# Altium PCB Colour-Sensor.PcbDoc
Units mm, origin at the board's own origin, x right, y up, seen from the top; angles counter-clockwise.
Board outline 31.5 x 40.5 mm, 2 copper layers (Top Layer, Bottom Layer), stack 1.611 mm thick; 40 components, 30 nets, 135 pads, 31 vias.
Unrouted connection lines stored in the file: 1.
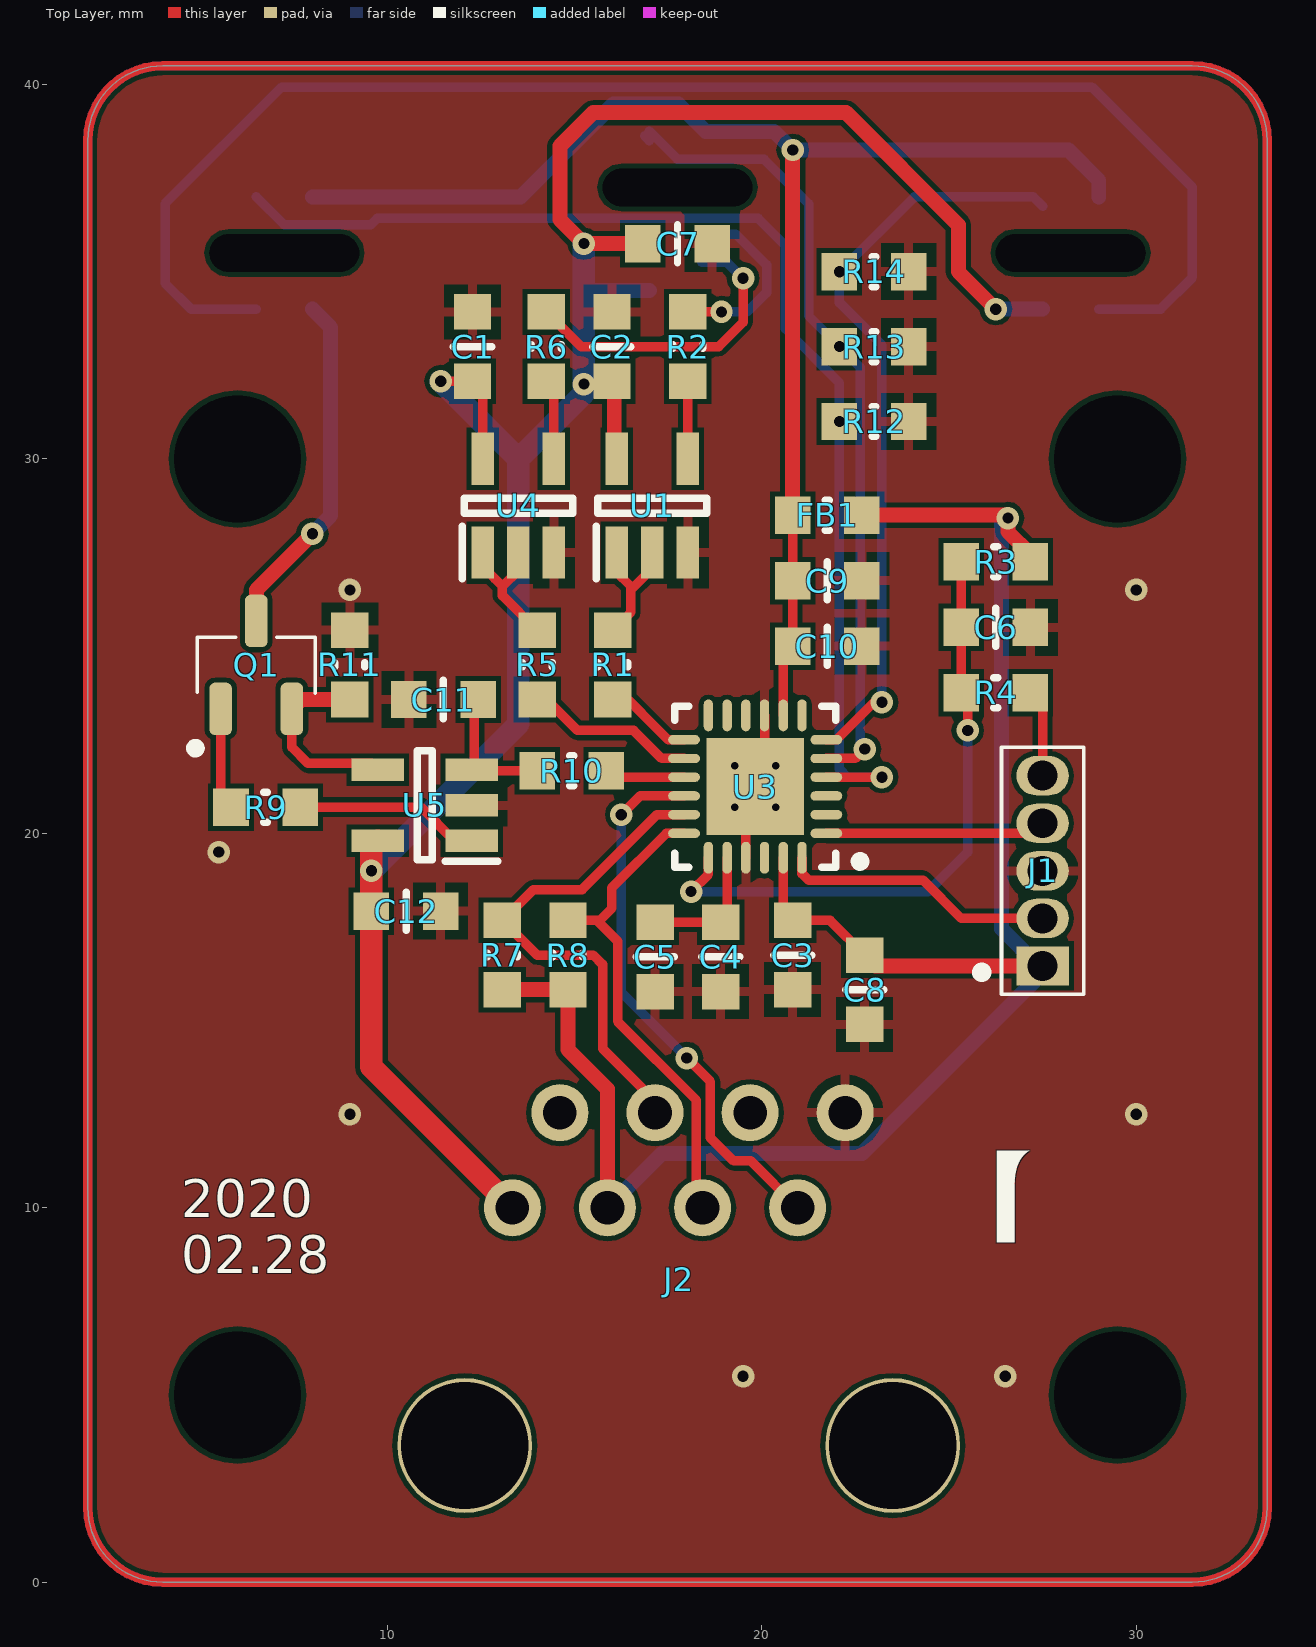
[diagram p0: Top Layer view]
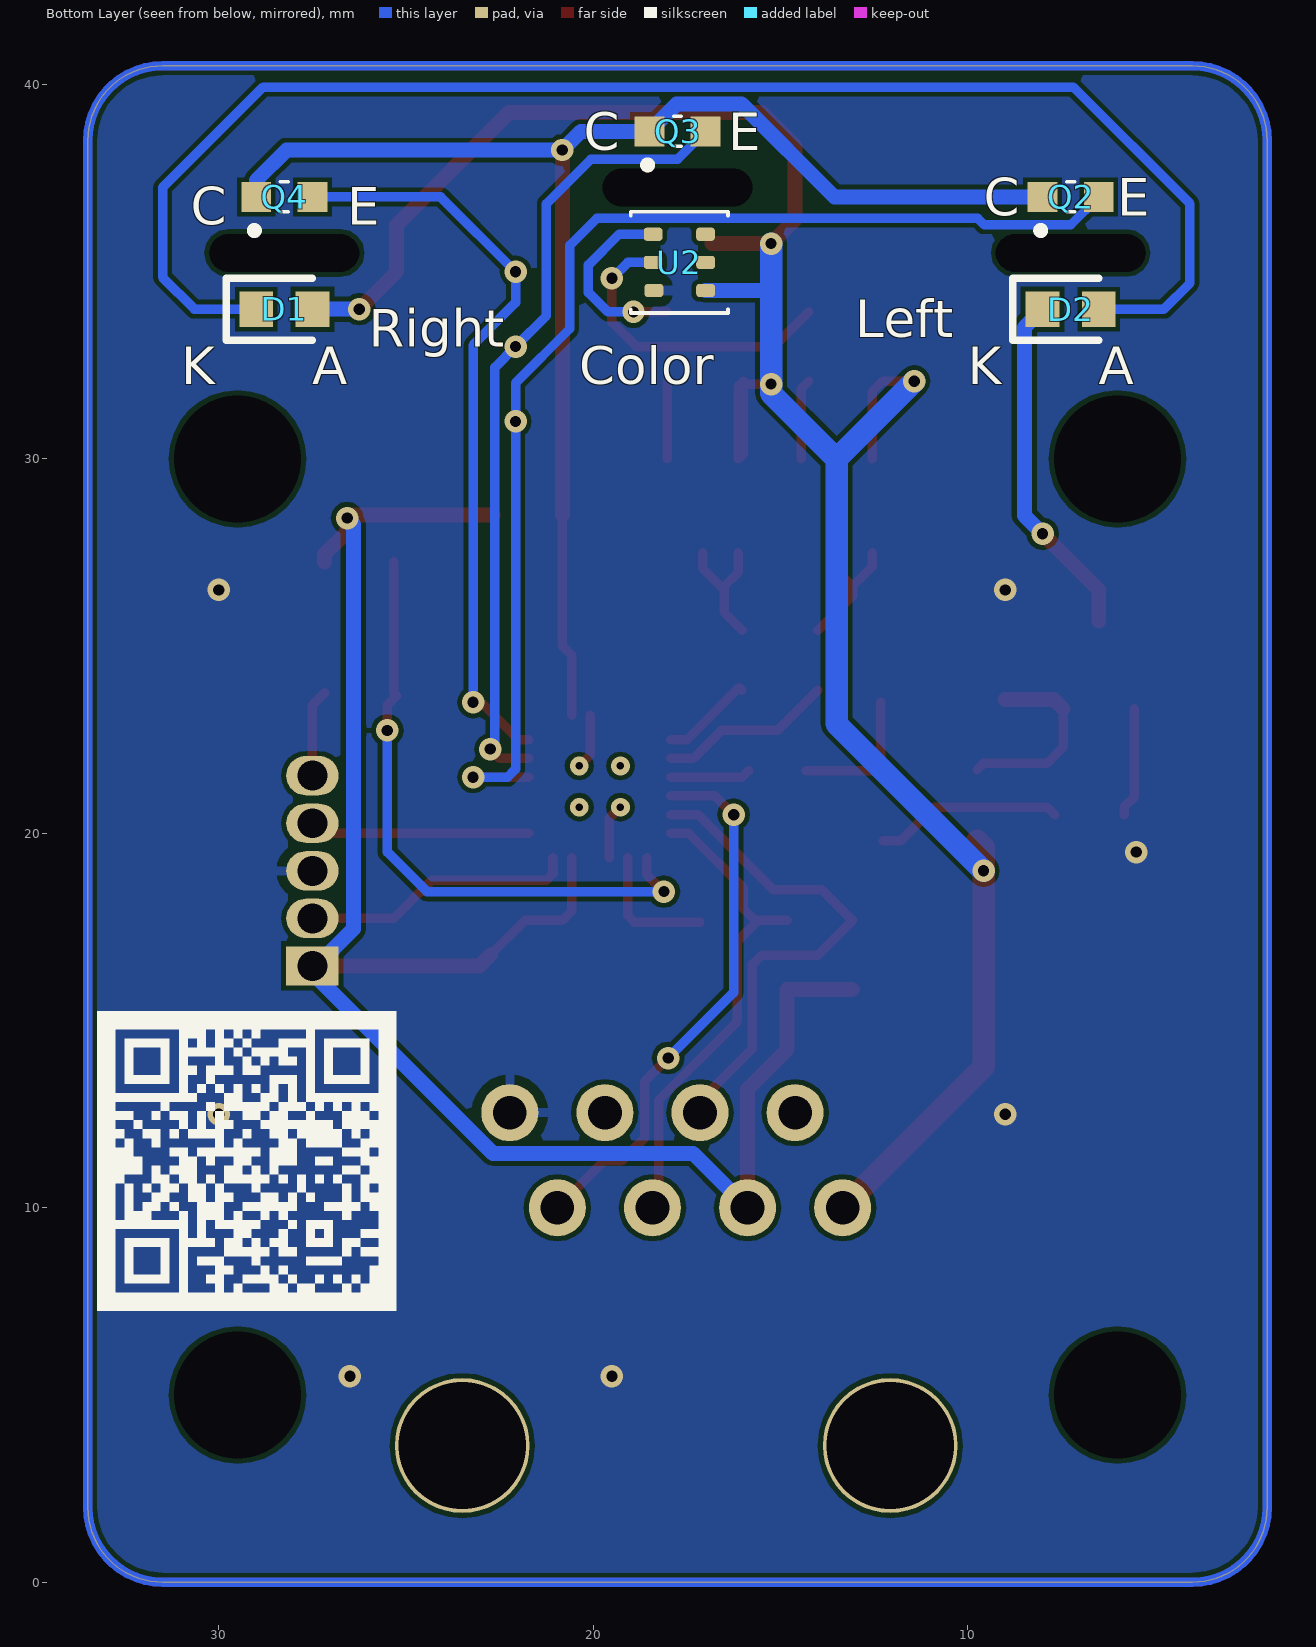
[diagram p1: Bottom Layer view, seen from below]
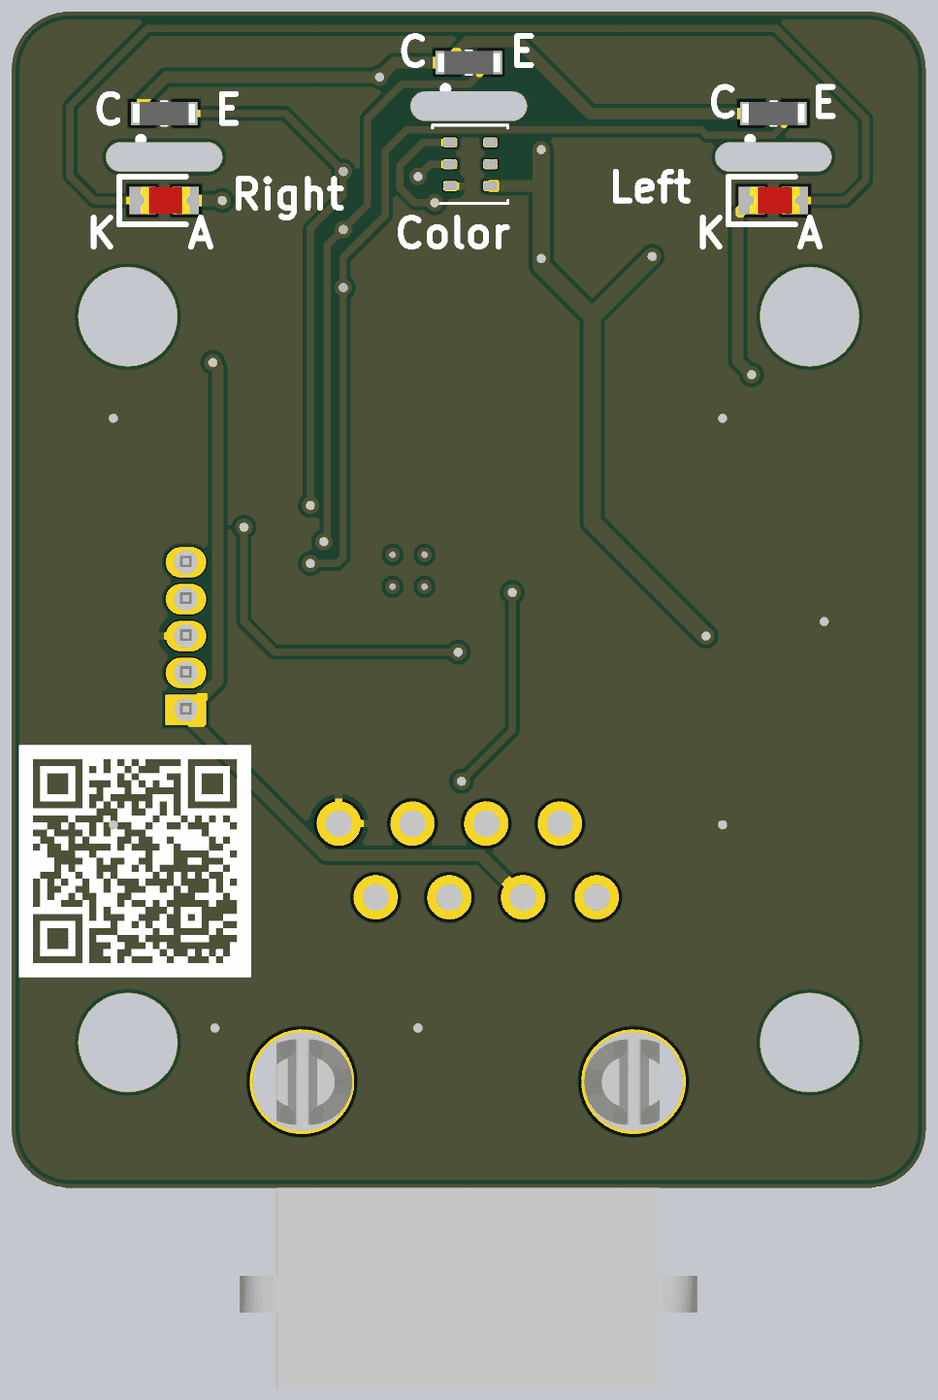
[diagram p2: 3D render of the assembled board from below, using the file's embedded part models]

## Layer stack, top to bottom
Top Solder: solder mask 0.0102, Solder Resist, Dk 3.5
Top Layer: signal copper 0.0356
Dielectric 1: dielectric 1.54, FR-4, Dk 4.8
Bottom Layer: signal copper 0.0356
Bottom Solder: solder mask 0.0102, Solder Resist, Dk 3.5

## Board outline
2,2 ccw(c4,2) 4,0 31.5,0 ccw(c31.5,2) 33.5,2 33.5,38.5 ccw(c31.5,38.5) 31.5,40.5 4,40.5 ccw(c4,38.5) 2,38.5

## Design rules (kind name [scope] priority, off if disabled: settings)
Clearance [All] p1: gap=0.127 ignorepadtopadclearanceinfootprint=FALSE
PolygonConnect PolygonConnect_1 [All vs IsVia] p1: connectstyle=Direct reliefconductorwidth=0.254 reliefentries=4 polygonreliefangle="90 Angle" airgapwidth=0.254
PolygonConnect [All] p2: connectstyle=Relief reliefconductorwidth=0.254 reliefentries=4 polygonreliefangle="90 Angle" airgapwidth=0.254
RoutingVias [All] p1: holewidth=0.3 width=0.6 viastyle="Through Hole" minholewidth=0.3 minwidth=0.6 maxholewidth=2 maxwidth=2.5
SolderMaskExpansion [All] p1: expansion=0.102
Width [All] p1: maxlimit=12.7 minlimit=0.127 preferedwidth=0.254
30 further rules are at their usual default settings.

## Components (designator, comment, footprint, x,y, rotation, side; value= is the part's Value field where it differs from the comment)
C1 "100nF" CAP1608X06M 12.275,33 r270 top
C2 "100nF" CAP1608X06M 16,33 r270 top
C3 "100nF" CAP1608X06M 20.825,16.75 r90 top
C4 "100nF" CAP1608X06M 18.9,16.7 r90 top
C5 "1uF" CAP1608X06M 17.15,16.7 r90 top
C6 "100nF" CAP1608X06M 26.25,25.5 r180 top
C7 "100nF" CAP1608X06M 17.75,35.75 r180 top
C8 "10uF" CAP1608X06M 22.75,15.825 r90 top
C9 "10uF" CAP1608X06M 21.75,26.75 r180 top
C10 "100nF" CAP1608X06M 21.75,25 r180 top
C11 "100nF" CAP1608X06M 11.5,23.575 r0 top
C12 "100nF" CAP1608X06M 10.5,17.925 r180 top
D1 "LTST-C190CKT" LEDC1608X90N 28.25,34 r180 bottom
D2 "LTST-C190CKT" LEDC1608X90N 7.25,34 r180 bottom
FB1 "200@100MHz" RESC1608X06M 21.75,28.5 r180 top
J1 "SWD" Sullins_GRPB051VWVN-RC 27.5,19 r90 top
J2 "RJ45-8P8C-S" RJ45-8P8C 13.339,10 r0 top locked
Q1 "NX7002AK,215" SOT-23-3 6.5,24.5 r90 top
Q2 "KDT00030TR" KDT00030TR 7.25,37 r180 bottom
Q3 "KDT00030TR" KDT00030TR 17.75,38.75 r180 bottom
Q4 "KDT00030TR" KDT00030TR 28.25,37 r180 bottom
R1 "100" RESC1608X06M 16.025,24.5 r90 top
R2 "100" RESC1608X06M 18.025,33 r90 top
R3 "10K" RESC1608X06M 26.25,27.25 r0 top
R4 "100" RESC1608X06M 26.25,23.75 r180 top
R5 "100" RESC1608X06M 14,24.5 r90 top
R6 "100" RESC1608X06M 14.25,33 r90 top
R7 "10K" RESC1608X06M 13.075,16.75 r270 top
R8 "10K" RESC1608X06M 14.825,16.75 r270 top
R9 "10" RESC1608X06M 6.75,20.7 r180 top
R10 "10K" RESC1608X06M 14.925,21.675 r0 top
R11 "100" RESC1608X06M 9,24.5 r270 top
R12 "10K" RESC1608X06M 23,31 r0 top
R13 "10K" RESC1608X06M 23,33 r0 top
R14 "10K" RESC1608X06M 23,35 r0 top
U1 "OR gate" SOT95P270X145-5N 17.075,28.75 r90 top
U2 "APA102-2020" APA102 18.4,36 r180 bottom
U3 "ATSAML10D16" QFN50P400X400X90_HS-25N 19.825,21.25 r180 top
U4 "OR gate" SOT95P270X145-5N 13.5,28.75 r90 top
U5 "OpAmp" SOT95P270X145-5N 11,20.75 r180 top

## Footprints (in the part's own frame and the unit in brackets; to place one, negate y for a bottom-side part, rotate by r counter-clockwise, add the part's x,y. Pads: shape width x height; smd on the part's side, far side on the other; paste and mask are expansions set on the pad)
APA102 [mm]
  rrect45% 0.5x0.35 smd paste-0.025 mask+0.05: 1(0,0) 2(0,-0.75) 3(0.021,-1.5) 4(1.4,-1.5) 5(1.4,-0.75) 6(1.4,0)
  silkscreen extent -0.6,-2.1 2,0.6, body extent -0.3,-1.78 1.7,0.3, height 0.9
CAP1608X06M [mm] "Chip Capacitor 2-Leads, Body 1,60x0,80mm, IPC Low Density"
  rect 0.95x1 smd: 1(-0.925,0) 2(0.925,0)
  silkscreen extent 0,-0.51 0,0.51, body extent -0.85,-0.45 0.85,0.45, height 0.6
KDT00030TR [mm]
  rect 0.8x0.8 smd: 1(-0.75,0) 2(0.75,0)
  silkscreen extent -0.9,-1 0.1,0.4, body extent -1.07,-0.4 1.07,0.4, height 0.7
LEDC1608X90N [mm]
  rect 0.9x0.95 smd: 1(-0.75,0) 2(0.75,0)
  silkscreen extent -1.55,-0.82 0.75,0.82, body extent -0.8,-0.45 0.9,0.45, height 0.9
QFN50P400X400X90_HS-25N [mm] "QFN, 24-Leads, Body 4,00x4,00mm, Pitch 0,50mm, Thermal Pad 2,60x2,60mm, IPC Medium Density"
  oval 0.85x0.25 smd paste+0.05 mask+0.05: 1(-1.9,1.25) 2(-1.9,0.75) 3(-1.9,0.25) 4(-1.9,-0.25) 5(-1.9,-0.75) 6(-1.9,-1.25) 13(1.9,-1.25) 14(1.9,-0.75) 15(1.9,-0.25) 16(1.9,0.25) 17(1.9,0.75) 18(1.9,1.25)
  oval 0.25x0.85 smd paste+0.05 mask+0.05: 7(-1.25,-1.9) 8(-0.75,-1.9) 9(-0.25,-1.9) 10(0.25,-1.9) 11(0.75,-1.9) 12(1.25,-1.9) 19(1.25,1.9) 20(0.75,1.9) 21(0.25,1.9) 22(-0.25,1.9) 23(-0.75,1.9) 24(-1.25,1.9)
  rect 2.6x2.6 smd paste+0.05 mask+0.05: 25(0,0)
  silkscreen extent -2.93,-2.15 2.15,2.15, body extent -2,-2 2,2, height 0.9
RESC1608X06M [mm] "Chip Resistor, 2-Leads, Body 1,60x0,80mm, IPC Low Density"
  rect 0.95x1 smd: 1(-0.925,0) 2(0.925,0)
  silkscreen extent -0.05,-0.4 0.05,0.4, body extent -0.85,-0.45 0.85,0.45, height 0.6
RJ45-8P8C [mil]
  round 141.73 hole 133.86: 0(-50,-250) 0(400,-250)
  round 60 hole 35.43: 1(0,0) 2(50,100) 3(100,0) 4(150,100) 5(200,0) 6(250,100) 7(300,0) 8(350,100)
  body extent -136,-665 484,145, height 638
SOT95P270X145-5N [mm]
  rect 1.4x0.6 smd: 1(-1.25,0.95) 2(-1.25,0) 3(-1.25,-0.95) 4(1.25,-0.95) 5(1.25,0.95)
  silkscreen extent -1.95,-1.45 0.2,1.5, body extent -1.35,-1.45 1.35,1.45, height 1.45
SOT-23-3 [mm]
  rrect50% 1.4x0.6 smd paste-0.025 mask+0.05: 1(-1.175,0.95) 2(-1.175,-0.95) 3(1.175,0)
  silkscreen extent -2.35,-1.58 0.74,1.75, body extent -1.5,-1.53 1.5,1.53, height 1.4
Sullins_GRPB051VWVN-RC [mm]
  rect 1.05x1.4 hole 0.8 paste-2 mask+0.05: 1(-2.54,0)
  rrect100% 1.05x1.4 hole 0.8 paste-2 mask+0.05: 2(-1.27,0) 3(0,0) 4(1.27,0) 5(2.54,0)
  silkscreen extent -3.3,-1.1 3.3,1.63, body extent -3.17,-1.07 3.18,1.07, height 4

## Part data
C1 C2 C3 C4 C6 C7 C10 C11 C12: library part "Capacitor 100n"
C5: library part "Capacitor 1u"
C8 C9: library part "Capacitor 10u"
D1 D2: "LED", Manufacturer_Name=Lite-On, Mouser2 Part Number=859-LTST-C190CKT, Datasheet Link=https://componentsearchengine.com/Datasheets/1/LTST-C190CKT.pdf, Height=0.9mm, Manufacturer_Part_Number=LTST-C190CKT, Mouser2 Price/Stock=https://www.mouser.com/Search/Refine.aspx?Keyword=859-LTST-C190CKT
FB1: library part "Generic ferrite bead"
Q1: Manufacturer=Nexperia, Author=ChAl, ComponentHeight=1.1mm, Device=NX7002AK,215, Manufacturer Part Number=NX7002AK,215, Mounted=Yes, Part Description="MOSFET, N-CH, 60V, 190mA, -55/+150, TO-236AB", Part Number=NX7002AK,215, SMD=Yes
Q2 Q3 Q4: "Phototransistor", Manufacturer_Name="ON Semiconductor", Datasheet Link=https://www.onsemi.com/pub/Collateral/KDT00030-D.PDF, Height=0.6mm, Manufacturer_Part_Number=KDT00030TR
R1 R2 R4 R5 R6 R11: library part "Resistor 100"
R3 R7 R8 R10 R12 R13 R14: library part "Resistor 10K"
R9: library part "Resistor 10"
U1 U4: library part SN74LV1T32, Manufacturer_Name="Texas Instruments", Manufacturer_Part_Number=SN74LV1T32DCKR, Datasheet Link=http://www.ti.com/lit/ds/symlink/sn74lv1t32.pdf, Mouser2 Price/Stock=https://hu.mouser.com/Search/Refine?Keyword=SN74LV1T32DCKR, Mouser code=595-SN74LV1T32DCKR
U2: "RGB LED"
U3: "48MHz 32bit ARM MCU", Flash size=16kB, RAM size=4kB
U5: library part MCP6001T-I_OT, "Integrated Circuit", Manufacturer_Name=Microchip, Manufacturer_Part_Number=MCP6001T-I/OT, Mouser2 Part Number=579-MCP6001T-I/OT, Datasheet Link=https://componentsearchengine.com/Datasheets/1/MCP6001T-I_OT.pdf, Height=1.45mm, Mouser2 Price/Stock=https://www.mouser.com/Search/Refine.aspx?Keyword=579-MCP6001T-I%2FOT
J2: Datasheet=/Robotics%20Platform/Datasheets/Connectors/5721-8P8C-????.pdf

## Free pads (board coordinates)
  round 1.524 hole 3.4: 2(6,5) 3(29.5,5) 4(29.5,30) 5(6,30)
  round 0 hole 1 slot 4 at 0 deg: 5(7.25,35.5) 5(17.75,37.25) 5(28.25,35.5)

## Via types
v1: diameter 0.6, hole 0.3, Top Layer to Bottom Layer, tented both sides, 27 vias
v2: diameter 0.5, hole 0.2, Top Layer to Bottom Layer, tented both sides, 4 vias

## Nets (pads, with @x,y where several pads share a name; then routed paths per layer and width w, separated by ;. In a path a pad name is that pad's centre, name@x,y a point inside that pad or via, vN(x,y) a via of type N, cw(c..) or ccw(c..) an arc to the next point about the centre after c; other vN are vias at no path point)
3V3: C3.2 C8.2 FB1.1 J1.1 J2.3 R3.2 R7.2 R8.2 U3.23 | length 49.3
  Top Layer w0.254: U3.23 20.575,17.925 C3.2 21.825,17.675 C8.2
  Top Layer w0.4: R7.2 R8.2 14.825,14.222 15.879,13.168 J2.3 ; FB1.1 26.494,28.5 v1(26.573,28.421) 26.573,28.058 27.175,27.456 R3.2 ; C8.2 23.04,16.46 J1.1
  Bottom Layer w0.4: J2.3 17.33,11.451 22.68,11.451 27.5,16.271 J1.1 27.39,16.46 26.406,17.444 26.406,28.254 v1(26.573,28.421)
3V3ANA: C9.2 C10.2 FB1.2 Q2.1 Q3.1 Q4.1 U3.8 | length 38.5
  Top Layer w0.254: U3.8 20.575,24.75 C10.2 C9.2 FB1.2
  Top Layer w0.4: FB1.2 v1(20.825,38.25)
  Bottom Layer w0.4: Q2.1 13.561,37 16.038,39.477 17.773,39.477 Q3.1 20.325,38.75 v1(20.825,38.25) 28.189,38.25 29,37.439 Q4.1
5V: C1.2 C2.2 C7.2 C12.2 D1.2 J2.1 U1.5 U2.4 U4.5 U5.5 | length 63.8
  Top Layer w0.254: v1(11.425,32.075) C1.2 12.55,31.8 U4.5 ; v1(15.25,32) C2.2@16,32 ; C2.2 C2.2@16,32 ; C2.2@16,32 16.075,32 16.125,31.95 U1.5 16,30.125 C2.2@16,32
  Top Layer w0.4: C7.2 v1(15.25,35.75) 14.609,36.391 14.609,38.359 15.5,39.25 22.25,39.25 25.25,36.25 25.25,35 v1(26.25,34)
  Top Layer w0.6: U5.5 9.575,19.625 v1(9.575,19) C12.2 9.575,13.764 J2.1
  Bottom Layer w0.4: 15.25,34.509 15.259,34.5 U2.4 ; v1(26.25,34) D1.2
  Bottom Layer w0.6: v1(9.575,19) 13.5,22.925 13.5,30 ; v1(11.425,32.075) 13.5,30 ; v1@15.25,35.75 15.25,34.509 v1(15.25,32) 15.25,31.75 13.5,30
AIN0: Q2.2 R12.1 U3.4 | length 32.1
  Top Layer w0.254: U3.4 v1(23.21,21.5)
  Bottom Layer w0.254: Q2.2 7.246,36.254 9.562,36.254 9.737,36.429 19.9,36.429 20.628,35.701 20.628,33.478 22.075,32.031 v1(22.075,31) 22.075,21.715 22.29,21.5 v1(23.21,21.5)
AIN1: Q3.2 R13.1 U3.5 | length 21.5
  Top Layer w0.254: U3.5 22.5,22 v1(22.75,22.25)
  Bottom Layer w0.254: Q3.2@16.875,38.625 Q3.2@17,38.5 ; Q3.2 17.746,38.004 20.062,38.004 21.25,36.816 21.25,33.825 v1(22.075,33) 22.629,32.446 22.629,22.371 v1(22.75,22.25)
AIN2: Q4.2 R14.1 U3.6 | length 20.2
  Top Layer w0.254: U3.6 22,22.5 23,23.5 v1(23.21,23.5)
  Bottom Layer w0.254: v1(23.21,23.5) 23.21,33.04 22.075,34.175 v1(22.075,35) 24.075,37 27.25,37 Q4.2@27.5,36.75
DIM: R10.2 U3.15 | length 2.1
  Top Layer w0.254: R10.2 16.025,21.5 U3.15
GND: C1.1 C2.1 C3.1 C4.1 C5.1 C6.1 C7.1 C8.1 C9.1 C10.1 C11.1 C12.1 J1.3 J2.8 R11.1 R12.2 R13.2 R14.2 U1.3 U2.3 U3.9 U3.21 U4.3 U5.2 | length 2.9
  Top Layer w0.254: 19.275,20.7 19.575,20.4 U3.21 ; U3.9 20.075,22.1 20.375,21.8
  other v1: 19.5,5.5 26.5,5.5 9,12.5 30,12.5 5.5,19.5 9,26.5 30,26.5
LED_CKI: R5.1 U3.14 | length 4.7
  Top Layer w0.254: R5.1@14,23.825 15.075,22.75 16.575,22.75 17.325,22 U3.14
LED_SDI: R1.1 U3.13 | length 2.5
  Top Layer w0.254: R1.1@16.03,23.82 16.105,23.895 17.5,22.5 U3.13
MCU_INT: J2.7 U3.16 | length 14.6
  Top Layer w0.254: v1(16.25,20.5) 16.75,21 U3.16 ; v1(18,14) 18.631,13.369 18.631,11.869 19.25,11.25 19.709,11.25 J2.7
  Bottom Layer w0.254: v1(16.25,20.5) 16.25,15.75 v1(18,14)
MCU_SCL: J2.5 R8.1 U3.18 | length 13.2
  Top Layer w0.254: R8.1 15.6,17.675 ; U3.18 17.45,20 16,18.55 16,18 15.675,17.675 15.6,17.675 ; J2.5 18.25,10.169 18.25,12.876 16.15,14.976 16.15,17.125 15.6,17.675
MCU_SDA: J2.4 R7.1 U3.17 | length 13.7
  Top Layer w0.254: J2.4 17.149,12.851 15.75,14.25 15.75,16.5 15.5,16.75 14,16.75 R7.1 13.9,18.5 15.2,18.5 17.2,20.5 U3.17
NetC4_2: C4.2 C5.2 U3.20 | length 3.5
  Top Layer w0.254: C5.2 C4.2 19.075,17.8 U3.20
NetC11_2: C11.2 R10.1 U5.3 | length 3.9
  Top Layer w0.254: C11.2@12.325,23.5 12.325,21.775 U5.3 12.275,21.675 R10.1 R10.1@14.325,21.675
NetD1_1: D1.1 D2.2 | length 39.9
  Bottom Layer w0.254: D2.2 4.759,34 4.067,34.692 4.067,36.817 7.181,39.931 28.819,39.931 31.5,37.25 31.5,34.848 30.652,34 D1.1
NetD2_1: D2.1 Q1.3 | length 9.3
  Top Layer w0.4: Q1.3 6.5,26.5 v1(8,28)
  Bottom Layer w0.4: v1(8,28) 8.486,28.486 8.486,33.514 D2.1
NetQ1_1: Q1.1 R9.2 | length 2.9
  Top Layer w0.254: Q1.1 5.55,20.975 R9.2 R9.2@5.825,20.5
NetQ1_2: Q1.2 R11.2 U5.4 | length 5.2
  Top Layer w0.254: Q1.2 7.45,22.3 7.881,21.869 9.581,21.869 U5.4
  Top Layer w0.4: Q1.2 7.7,23.575 R11.2
NetR1_2: R1.2 U1.1 U1.2 | length 3.7
  Top Layer w0.254: R1.2 16.5,25.9 16.5,26.5 ; U1.1 16.125,26.975 16.5,26.6 16.5,26.5 ; U1.2 17.075,27.075 16.5,26.5
NetR2_1: R2.1 U1.4 | length 2.1
  Top Layer w0.254: U1.4 R2.1
NetR2_2: R2.2 U2.1 | length 5.1
  Top Layer w0.254: R2.2 v1(18.925,33.925)
  Bottom Layer w0.254: U2.1 19.311,36 20.129,35.182 20.129,34.444 19.61,33.925 v1(18.925,33.925)
NetR5_2: R5.2 U4.1 U4.2 | length 3.8
  Top Layer w0.254: U4.1 12.55,27.125 12.875,26.8 13.075,26.6 ; U4.2 13.5,27.025 13.075,26.6 ; R5.2 13.075,26.35 13.075,26.6
NetR6_1: R6.1 U4.4 | length 2.2
  Top Layer w0.254: R6.1 14.45,31.875 U4.4
NetR6_2: R6.2 U2.2 | length 8.4
  Top Layer w0.254: R6.2 15.175,33 18.85,33 19.5,33.65 v1(19.5,34.825)
  Bottom Layer w0.254: U2.2 19.075,35.25 v1(19.5,34.825)
NetR9_1: R9.1 U5.1 | length 5
  Top Layer w0.254: R9.1@7.675,20.5 7.875,20.7 10.895,20.7 11.795,19.8 U5.1
nRST: C6.2 R3.1 R4.2 U3.19 | length 16.8
  Top Layer w0.254: v1(18.113,18.444) 18.575,18.906 U3.19 ; R3.1 C6.2 R4.2 25.25,23.675 25.5,23.425 v1(25.5,22.75)
  Bottom Layer w0.254: v1(18.113,18.444) 24.444,18.444 25.5,19.5 v1(25.5,22.75)
nRSTE: J1.5 R4.1 | length 2.3
  Top Layer w0.254: R4.1 27.5,23.425 J1.5
SWCLK: J1.2 U3.24 | length 7.3
  Top Layer w0.254: U3.24 21.075,18.925 21.25,18.75 24.309,18.75 25.329,17.73 J1.2
SWDIO: J1.4 U3.1 | length 5.9
  Top Layer w0.254: U3.1 27.23,20 J1.4
pads on no net: J2.0 J2.2 J2.6 U2.5 U2.6 U3.2 U3.3 U3.7 U3.10 U3.11 U3.12 U3.22 U3.25
copper on no net:
  other v2: 19.275,20.7 20.375,20.7 19.275,21.8 20.375,21.8

## Polygon pours and split planes (outlines as drawn)
GND on Top Layer "Top Layer-GND" (solid, remove dead copper, pour order 2): 2,0 33.5,0 33.5,40.5 2,40.5
GND on Bottom Layer "Bottom Layer-GND" (solid, remove dead copper, pour order 0): 2,0 33.5,0 33.5,40.5 2,40.25

## Other copper
Multi-Layer:
  the board outline again, w0.254

## Silkscreen, mask and mechanical layers (free items; w line width, h text height)
Top Overlay:
  text "2020 / 02.28" at 4.5,8.25 h1
  text "r" at 25.8,7.75 h7
Bottom Overlay:
  drawing of 252 lines, arcs and shapes, not listed
  text "E" at 16.4,38.25 h1
  text "C" at 20.25,38.25 h1
  text "E" at 6,36.5 h1
  text "C" at 9.575,36.5 h1
  text "E" at 26.573,36.258 h1
  text "C" at 30.75,36.258 h1
  text "Left" at 13,33.25 h1
  text "Right" at 26,33 h1
  text "A" at 6.5,32 h1
  text "K" at 10,32 h1
  text "Color" at 20.375,32 h1
  text "A" at 27.5,32 h1
  text "K" at 31,32 h1

## Dimensions
31.5,40.5 to 31.5,0 on Mechanical 1
33.5,38.5 to 2,38.5 on Mechanical 1